# Altium PCB NUC977 DEV BOARD.PcbDoc (part 3 of 5)
Units mil, origin at the board's own origin, x right, y up, seen from the top; angles counter-clockwise.
Board outline 9012.5 x 7677.17 mil, 4 copper layers (Top, 2-GND, 3-POWER, Bottom), stack 35.4 mil thick; 487 components, 451 nets, 1969 pads, 1529 vias.
Unrouted connection lines stored in the file: 1.
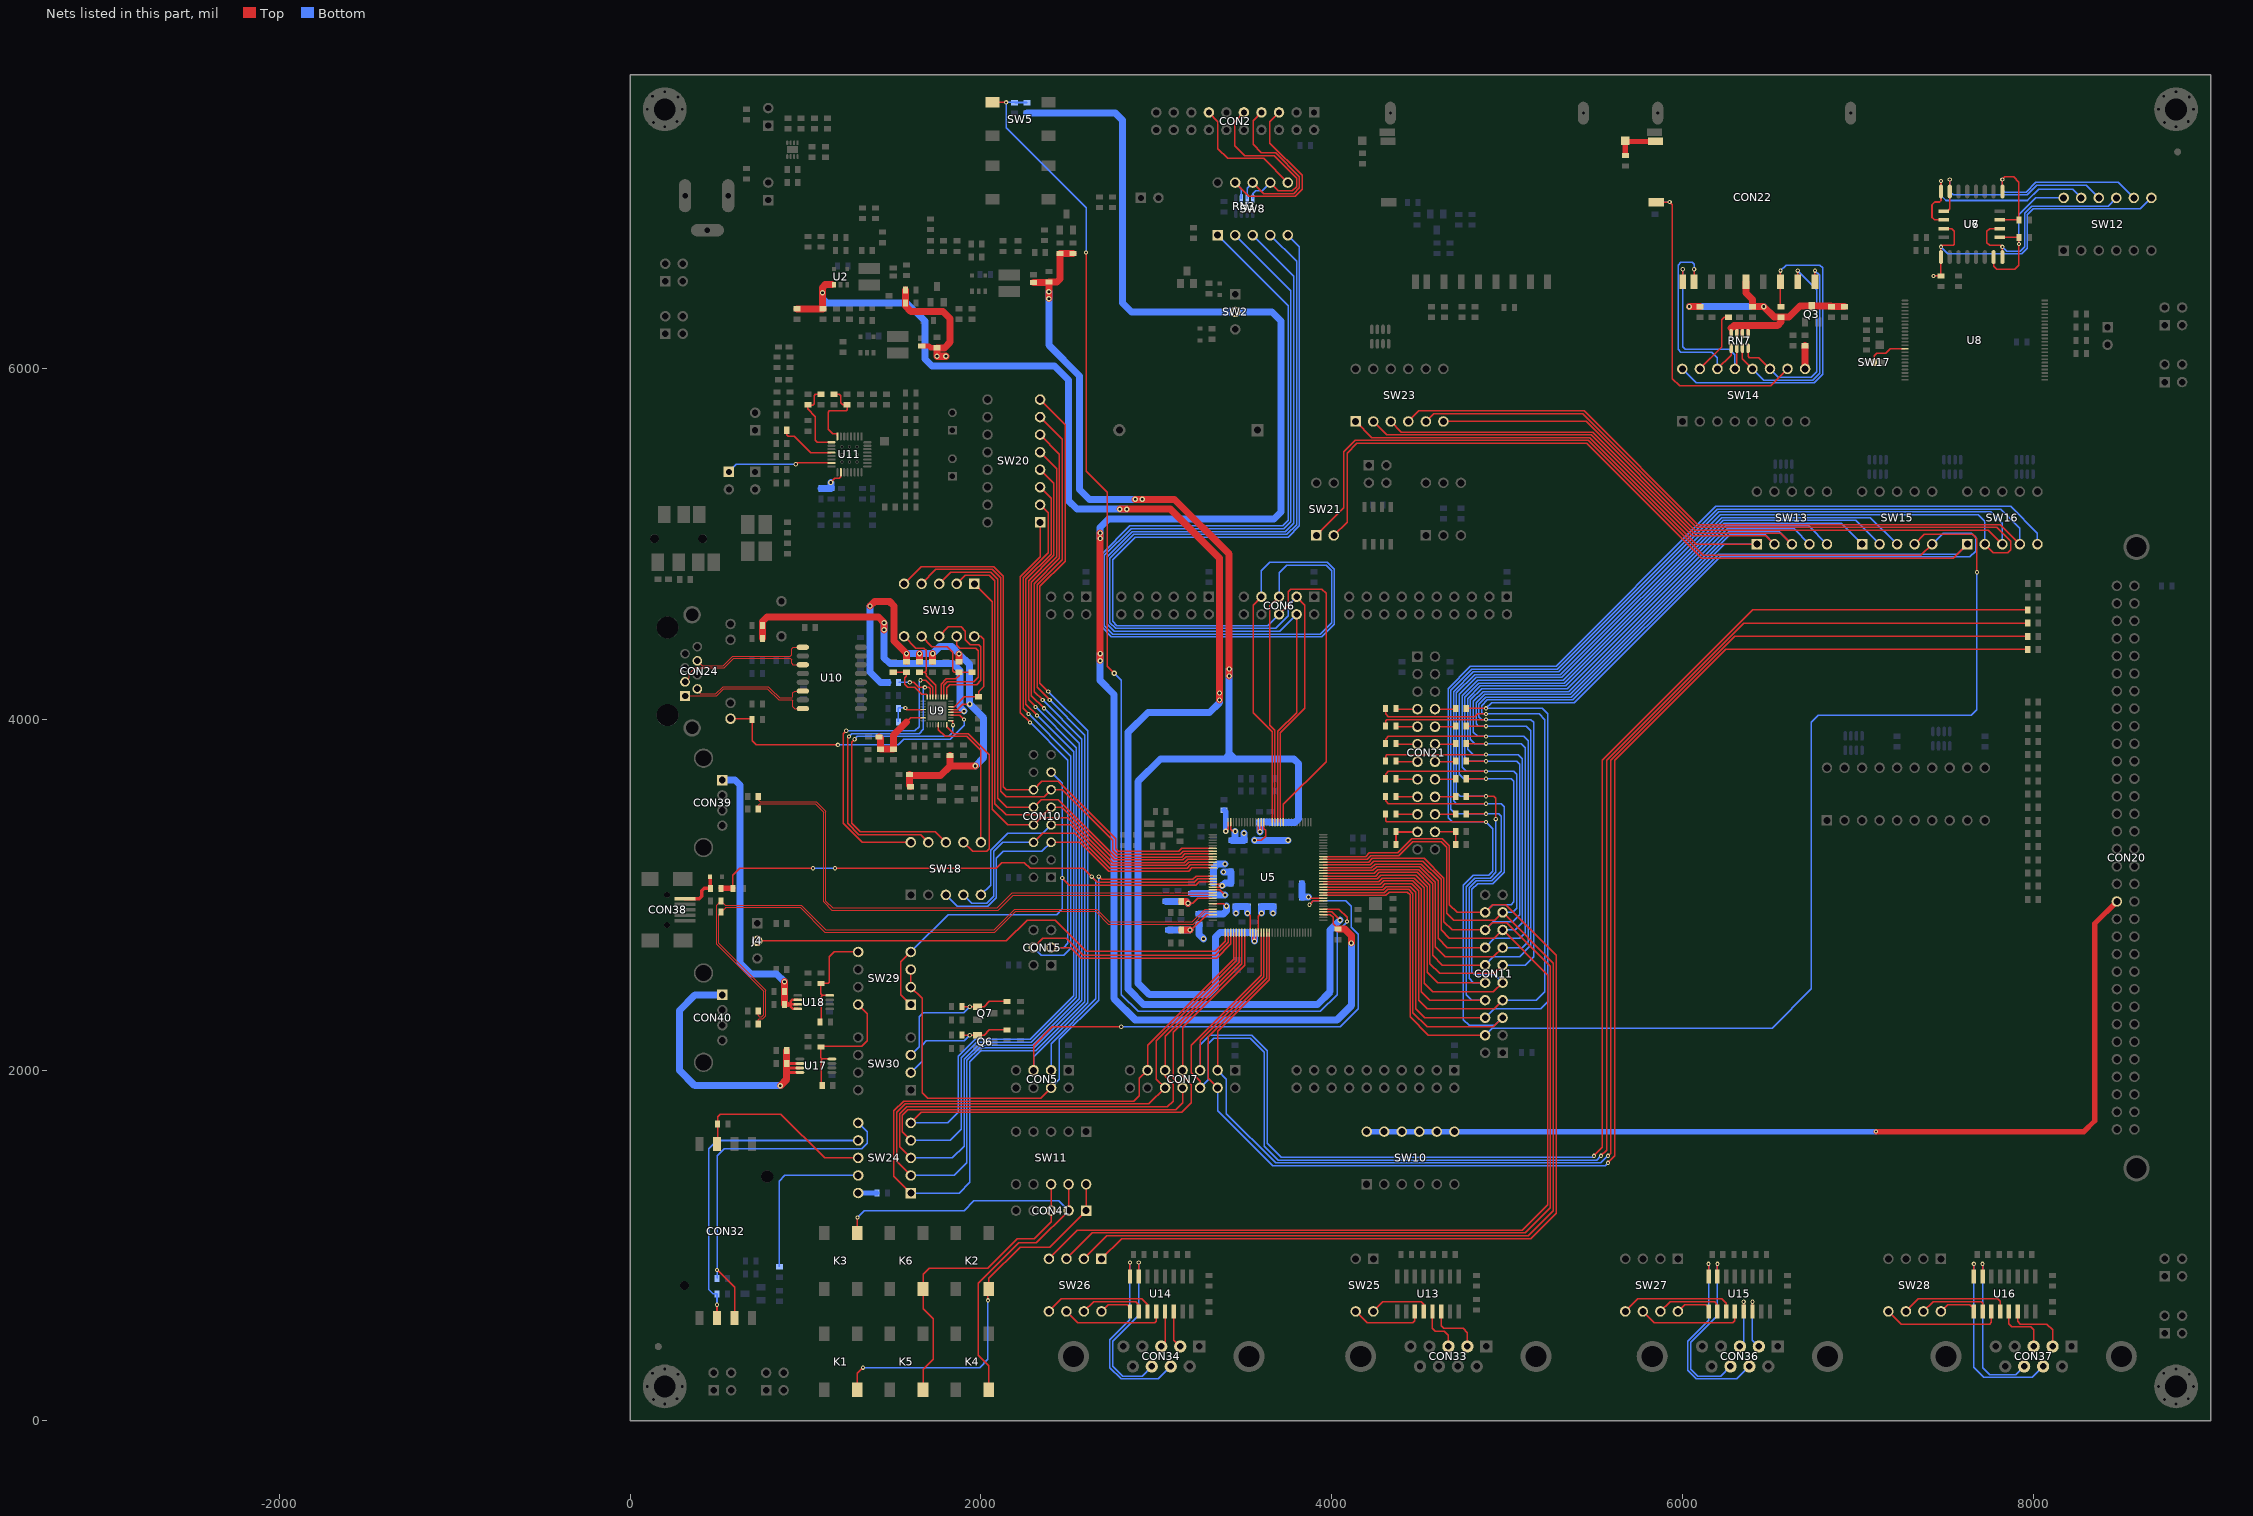
[diagram p5: the nets of this part, all layers, seen from the top]

## Via types
v1: diameter 24, hole 12, Top to Bottom, 897 vias
v2: diameter 30, hole 16, Top to Bottom, 628 vias
v3: diameter 20, hole 10, Top to Bottom, 4 vias

## Nets (pads, with @x,y where several pads share a name; then routed paths per layer and width w, separated by ;. In a path a pad name is that pad's centre, name@x,y a point inside that pad or via, vN(x,y) a via of type N, cw(c..) or ccw(c..) an arc to the next point about the centre after c; other vN are vias at no path point) (continued)
PF2: CON10.5 SW18.3 U5.109 | length 1906.9
  Top w8: CON10.5@2400,3300 2564,3300 2728,3136 3184,3136 3203.12,3155.12 U5.109@3322.54,3155.12
  Bottom w8: SW18.3@1800,3000 1864,2936 2040,2936 2088,2984 2088,3208 2128,3248 2348,3248 CON10.5@2400,3300
PF3: CON10.6 SW18.4 U5.108 | length 1848.7
  Top w8: CON10.6@2300,3300 2352,3352 2536,3352 2736,3152 3176,3152 3194.87,3170.87 U5.108@3322.54,3170.87
  Bottom w8: SW18.4@1900,3000 1948,2952 2032,2952 2072,2992 2072,3248 2124,3300 CON10.6@2300,3300
PF4: CON10.7 SW18.5 U5.107 | length 1709.2
  Top w8: CON10.7@2400,3400 2512,3400 2744,3168 3168,3168 3186.61,3186.61 U5.107@3322.54,3186.61
  Bottom w8: SW18.5@2000,3000 2056,3056 2056,3256 2152,3352 2352,3352 CON10.7@2400,3400
PF5: CON10.8 SW19.1 U5.106 | length 2754
  Top w8: SW19.1@1962,4774.5 2064,4672.5 2064,3488 2152,3400 CON10.8@2300,3400 2340,3440 2496,3440 2752,3184 3160,3184 3178.36,3202.36 U5.106@3322.54,3202.36
PF6: CON10.9 SW19.2 U5.105 | length 2942.8
  Top w8: SW19.2@1862,4774.5 1911.5,4824 2048,4824 2080,4792 2080,3520 2144,3456 2356,3456 CON10.9@2400,3500 2460,3500 2760,3200 3152,3200 3170.11,3218.11 U5.105@3322.54,3218.11
PF7: CON10.10 SW19.3 U5.104 | length 3035.3
  Top w8: SW19.3@1762,4774.5 1827.5,4840 2056,4840 2096,4800 2096,3552 2148,3500 CON10.10@2300,3500 2344,3544 2440,3544 2768,3216 3144,3216 3161.86,3233.86 U5.104@3322.54,3233.86
PF8: CON10.11 SW19.4 U5.103 | length 3152.5
  Top w8: SW19.4@1662,4774.5 1743.5,4856 2064,4856 2112,4808 2112,3592 2144,3560 2360,3560 CON10.11@2400,3600 2464,3600 2752,3312 2752,3256 2776,3232 3136,3232 3153.61,3249.61 U5.103@3322.54,3249.61
PF9: CON10.12 SW19.5 U5.102 | length 3256.3
  Top w8: SW19.5@1562,4774.5 1659.5,4872 2072,4872 2128,4816 2128,3616 2144,3600 CON10.12@2300,3600 2348,3648 2440,3648 2768,3320 2768,3264 2784,3248 3128,3248 3145.35,3265.35 U5.102@3322.54,3265.35
PF10: CON10.13 SW29.1 SW29.4 U5.114 | length 3002.1
  Top w8: SW29.1@1600,2374.5 1544,2430.5 1544,2618.5 SW29.4@1600,2674.5 ; v1(2464,3096) 2504,3056 3224,3056 3244.38,3076.38 U5.114@3322.54,3076.38
  Bottom w8: SW29.4@1600,2674.5 1813.5,2888 2432,2888 2464,2920 v1(2464,3096) 2464,3636 CON10.13@2400,3700
PG0: CON15.3 SW20.1 U5.3 | length 3814
  Top w8: v1(2280,3984) 2224,4040 2224,4814.5 2337.5,4928 SW20.1@2337.5,5125 ; CON15.3@2400,2700 2513,2700 2573,2640 3344,2640 3424.9,2720.9 U5.3@3424.9,2785.04
  Bottom w8: v1(2280,3984) 2496,3768 2496,2724 2472,2700 CON15.3@2400,2700
PG1: CON15.4 SW20.2 U5.2 | length 4224
  Top w8: v1(2272,4032) 2240,4064 2240,4808 2384,4952 2384,5178.5 SW20.2@2337.5,5225 ; CON15.4@2300,2700 2352,2752 2488,2752 2584,2656 3336,2656 3409.15,2729.15 U5.2@3409.15,2785.04
  Bottom w8: v1(2272,4032) 2512,3792 2512,2696 2472,2656 2344,2656 CON15.4@2300,2700
PG6: CON7.3 RL19.1 U5.17 | length 8418.1
  Top w8: CON7.3@3350,2000 3350,2222 3645.37,2517.37 U5.17@3645.37,2785.04 ; v1(5576,1512) 5592,1528 5592,3768 6299,4475 RL19.1@7970,4475
  Bottom w8: CON7.3@3350,2000 3400,1950 3400,1752 3680,1472 5536,1472 v1(5576,1512)
PG7: CON7.4 RL20.1 U5.16 | length 8466.6
  Top w8: CON7.4@3350,1900 3296,1954 3296,2192 3629.63,2525.63 U5.16@3629.63,2785.04 ; v1(5576,1472) 5616,1512 5616,3768 6248,4400 RL20.1@7970,4400
  Bottom w8: CON7.4@3350,1900 3350,1770 3664,1456 5560,1456 v1(5576,1472)
PG8: CON7.5 RL21.1 U5.15 | length 9007.9
  Top w8: CON7.5@3250,2000 3250,2170 3613.88,2533.88 U5.15@3613.88,2785.04 ; v1(5496,1512) 5544,1560 5544,3768 6401,4625 RL21.1@7970,4625
  Bottom w8: CON7.5@3250,2000 3250,2146 3304,2200 3544,2200 3632,2112 3632,1584 3712,1504 5488,1504 v1(5496,1512)
PG9: CON7.6 RL22.1 U5.14 | length 9202.4
  Top w8: CON7.6@3250,1900 3250,1936 3200,1986 3200,2144 3598.13,2542.13 U5.14@3598.13,2785.04 ; v1(5536,1512) 5568,1544 5568,3768 6350,4550 RL22.1@7970,4550
  Bottom w8: CON7.6@3250,1900 3296,1946 3296,2152 3328,2184 3536,2184 3616,2104 3616,1568 3696,1488 5512,1488 v1(5536,1512)
PG10: CON7.7 SW20.3 SW24.5 U5.8 | length 7298.8
  Top w8: SW24.5@1600,1700 1660,1760 3144,1760 3200,1816 3200,1918 3150,1968 CON7.7@3150,2000 3150,2246 3503.64,2599.64 U5.8@3503.64,2785.04 ; v1(2320,4024) 2256,4088 2256,4800 2400,4944 2400,5262.5 SW20.3@2337.5,5325
  Bottom w8: SW24.5@1600,1700 1812,1700 1872,1760 1872,2080 1968,2176 2280,2176 2528,2424 2528,3816 v1(2320,4024)
PG11: CON7.8 SW20.4 SW24.4 U5.7 | length 7681.4
  Top w8: SW24.4@1600,1600 1552,1648 1552,1744 1584,1776 3112,1776 3150,1814 CON7.8@3150,1900 3096,1954 3096,2216 3487.89,2607.89 U5.7@3487.89,2785.04 ; v1(2312,4072) 2272,4112 2272,4792 2416,4936 2416,5346.5 SW20.4@2337.5,5425
  Bottom w8: SW24.4@1600,1600 1824,1600 1888,1664 1888,2072 1976,2160 2288,2160 2544,2416 2544,3840 v1(2312,4072)
PG12: CON7.9 SW20.5 SW24.3 U5.6 | length 7978.4
  Top w8: SW24.3@1600,1500 1536,1564 1536,1752 1576,1792 3064,1792 3096,1824 3096,1920 3050,1966 CON7.9@3050,2000 3050,2194 3472.15,2616.15 U5.6@3472.15,2785.04 ; SW20.5@2337.5,5525 2432,5430.5 2432,4928 2288,4784 2288,4136 v1(2360,4064)
  Bottom w8: SW24.3@1600,1500 1836,1500 1904,1568 1904,2064 1984,2144 2296,2144 2560,2408 2560,3864 v1(2360,4064)
PG13: CON7.10 SW20.6 SW24.2 U5.5 | length 8251.3
  Top w8: SW24.2@1600,1400 1520,1480 1520,1760 1568,1808 2958,1808 CON7.10@3050,1900 3000,1950 3000,2168 3456.4,2624.4 U5.5@3456.4,2785.04 ; SW20.6@2337.5,5625 2448,5514.5 2448,4920 2304,4776 2304,4160 v1(2352,4112)
  Bottom w8: SW24.2@1600,1400 1848,1400 1920,1472 1920,2056 1992,2128 2304,2128 2576,2400 2576,3888 v1(2352,4112)
PG14: CON7.11 SW20.7 SW24.1 U5.4 | length 8500.6
  Top w8: SW24.1@1600,1300 1504,1396 1504,1768 1560,1824 2872,1824 2904,1856 2904,1954 CON7.11@2950,2000 2950,2142 3440.65,2632.65 U5.4@3440.65,2785.04 ; SW20.7@2337.5,5725 2464,5598.5 2464,4912 2320,4768 2320,4184 v1(2392,4112)
  Bottom w8: SW24.1@1600,1300 1876,1300 1936,1360 1936,2048 2000,2112 2312,2112 2592,2392 2592,3912 v1(2392,4112)
PH0: CON5.3 R111.1 R113.2 U5.113 | length 4185.3
  Top w8: R113.2@585.5,3037.5 585.5,3113.5 624,3152 1042.46,3152 v1(1042.46,3152.16) ; v1(1168.31,3152.16) 1168.31,3152 2088,3152 2120,3184 2248,3184 2280,3152 2584,3152 v1(2632,3104) 2664,3072 3216,3072 3236.13,3092.13 U5.113@3322.54,3092.13
  Top w30: R111.1@517.5,3037.5 R113.2@585.5,3037.5
  Bottom w8: v1(1042.46,3152.16) 1072,3152 1152,3152 v1(1168.31,3152.16) ; CON5.3@2400,2000 2400,2152 2656,2408 2656,3080 v1(2632,3104)
PH1: CON5.4 SW29.2 SW29.3 U5.112 | length 3485.2
  Top w8: SW29.3@1600,2574.5 SW29.2@1600,2474.5 1664,2410.5 1664,1872 1696,1840 2340,1840 CON5.4@2400,1900 ; v1(2672,3104) 2688,3088 3208,3088 3227.87,3107.87 U5.112@3322.54,3107.87
  Bottom w8: CON5.4@2400,1900 2448,1948 2448,2176 2672,2400 v1(2672,3104)
PH7: CON5.5 SW20.8 U5.40 | length 7210.8
  Top w8: CON5.5@2300,2000 2300,2140 2408,2248 v1(2800,2248) ; SW20.8@2337.5,5825 2480,5682.5 2480,4904 2336,4760 2336,4208 v1(2384,4160) ; v1(3873.86,2944) 3896,2966.14 U5.40@3952.46,2966.14
  Bottom w8: CON5.5@2300,2000 2300,2076 2608,2384 2608,3936 v1(2384,4160) ; v1(2800,2248) 4048,2248 4152,2352 4152,2776 4112,2816 4112,2934.14 4080,2966.14 3896,2966.14 v1(3873.86,2944)
PHYAD0: CON24.9 R69.2 U9.11 | length 1628.9
  Top w8: CON24.9@571.95,4004.92 690.08,4004.92 R69.2@695,4000 695,3880 719,3856 v1(1184,3856) ; U9.11@1828.24,4025.88 1878.12,4025.88 v1(1904,4000)
  Bottom w8: v1(1184,3856) 1528,3856 1560,3888 1824,3888 1904,3968 v1(1904,4000)
PHYAD3: R64.1 R71.1 U9.12 | length 1835.6
  Top w8: U9.12@1828.24,4041.63 1896,4041.63 1902.37,4048 v2(1904,4048)
  Top w40: R71.1@755,4462.5 R64.1@755,4537.5 755,4560 779,4584 1416,4584 v2(1448,4552) v2(1448,4512)
  Bottom w40: v2(1448,4552) v2(1448,4512) 1448,4351.25 1480.5,4318.75 1840,4318.75 1880,4278.75 1880,4072 v2(1904,4048)
PHYAVD33: CB28.2 CT70.1 L7.2 U9.31 | length 438.9
  Top w8: 1576,3986.13 1600,4010.13 U9.31@1670.76,4010.13
  Top w40: L7.2@1420,3901 1427.5,3893.5 CB28.2@1427.5,3831 CT70.1@1502.5,3831 1501.87,3831.63 1501.87,3912 1576,3986.13
PHYIOVD33: CT68.1 L6.2 R55.2 R57.2 R59.2 R61.2 R122.2 R123.2 U9.13 | length 2845.8
  Top w8: U9.13@1828.24,4057.37 1865.37,4057.37 1896,4088 v2(1936,4088)
  Top w40: v2(1368,4648) 1392,4672 1480,4672 1504,4648 1504,4447 v2(1575,4376) R55.2@1575,4330 ; L6.2@1592,3687 L6.2@1592,3680 ; CT68.1@1599.5,3617 1592.5,3624 1592,3624 L6.2@1592,3680 ; R123.2@1650,4330 v2(1650,4376) ; R59.2@1725,4330 v2(1725,4376) ; R57.2@1825,3795 1825,3736 ; R61.2@1875,4330 v2(1875,4375) ; v2(1968,3736) 1825,3736 ; L6.2@1592,3680 1769,3680 1825,3736
  Bottom w40: v2(1368,4648) 1368,4272 1427.5,4212.5 R122.2@1470,4212.5 ; v2(1575,4376) v2(1650,4376) v2(1725,4376) 1765,4416 1834,4416 v2(1875,4375) 1936,4314 v2(1936,4088) 2016,4008 2016,3784 v2(1968,3736)
PHYTEST: R55.1 R56.2 U9.24 | length 310.6
  Top w8: R56.2@1500,4270 R55.1@1575,4270 1575,4248 1566.42,4239.42 1566.42,4201.97 1583.84,4184.55 1621.22,4184.55 1661.77,4144 1688,4144 1694.38,4137.62 U9.24@1694.38,4128.24
PI1: CON11.4 SW15.4 U5.42 | length 7504.2
  Top w8: U5.42@3952.46,2997.64 4309.64,2997.64 4328,3016 4432,3016 4448,3000 4448,2304 4552,2200 CON11.4@4875,2200 ; SW15.4@7325,5000 7381,5056 7656,5056 7680,5032 v1(7680,4840)
  Bottom w8: CON11.4@4875,2200 4915,2240 6512,2240 6736,2464 6736,3984 6776,4024 7648,4024 7680,4056 v1(7680,4840)
PI2: CON11.5 RS1.1 SW16.5 U5.43 | length 8789.5
  Top w8: U5.43@3952.46,3013.39 4301.39,3013.39 4320,3032 4440,3032 4464,3008 4464,2328 4544,2248 4923,2248 CON11.5@4975,2300 ; RS1.1@4307.5,3462.5 4307.5,3424 4315.5,3416 v1(4880,3416)
  Bottom w8: CON11.5@4975,2300 4931,2256 4784,2256 4752,2288 4752,3056 4808,3112 4896,3112 4920,3136 4920,3376 v1(4880,3416) 4688,3416 4664,3440 4664,4176 4792,4304 5280,4304 6192,5216 7872,5216 8025,5063 SW16.5@8025,5000
PI3: CON11.6 RS3.1 SW15.5 SW21.1 U5.44 | length 11891.9
  Top w8: SW21.1@3912.5,5050 4070.5,5208 4070.5,5526.5 4136,5592 5464,5592 6120,4936 7361,4936 SW15.5@7425,5000 ; U5.44@3952.46,3029.13 4293.13,3029.13 4312,3048 4448,3048 4480,3016 4480,2352 4532,2300 CON11.6@4875,2300 ; RS3.1@4767.5,4062.5 4767.5,4064 v1(4880,4064)
  Bottom w8: CON11.6@4875,2300 4927,2352 5192,2352 5232,2392 5232,4032 5200,4064 v1(4880,4064) 4912,4096 5384,4096 6216,4928 7640,4928 7672,4960 7672,5040 7648,5064 7489,5064 SW15.5@7425,5000
PI4: CON11.7 RS5.1 SW16.1 SW21.2 U5.45 | length 12072.9
  Top w8: U5.45@3952.46,3044.88 4284.88,3044.88 4304,3064 4456,3064 4496,3024 4496,2400 4544,2352 4927,2352 CON11.7@4975,2400 ; SW21.2@4012.5,5050 4088,5125.5 4088,5520 4144,5576 5456,5576 6112,4920 7545,4920 SW16.1@7625,5000 ; RS5.1@4307.5,4062.5 4307.5,4032 4323.5,4016 4816,4016 4832,4032 v1(4880,4032)
  Bottom w8: CON11.7@4975,2400 5168,2400 5216,2448 5216,4000 5184,4032 v1(4880,4032) 4864,4032 4856,4040 4856,4080 4888,4112 5376,4112 6208,4944 7569,4944 SW16.1@7625,5000
PI5: CON11.8 RS7.1 SW16.2 SW23.5 U5.46 | length 11289.4
  Top w8: U5.46@3952.46,3060.63 4276.63,3060.63 4296,3080 4464,3080 4512,3032 4512,2448 4560,2400 CON11.8@4875,2400 ; SW23.5@4537.5,5700 4581.5,5744 5432,5744 6080,5096 7792,5096 7872,5016 7872,4968 7856,4952 7773,4952 SW16.2@7725,5000 ; RS7.1@4767.5,3562.5 v1(4880,3562.5) 4925.5,3562.5 4936,3552 v1(4936,3432)
  Bottom w8: CON11.8@4875,2400 4800,2400 4768,2432 4768,3048 4816,3096 4904,3096 4936,3128 v1(4936,3432) ; v1(4880,3562.5) 4733.5,3562.5 4712,3584 4712,4152 4816,4256 5304,4256 6216,5168 7688,5168 7725,5131 SW16.2@7725,5000
PI6: CON11.9 RS9.1 SW16.3 SW23.6 U5.47 | length 11618.3
  Top w8: U5.47@3952.46,3076.38 4268.38,3076.38 4288,3096 4472,3096 4528,3040 4528,2496 4576,2448 4923,2448 CON11.9@4975,2500 ; RS9.1@4307.5,3562.5 4307.5,3536 4323.5,3520 v1(4880,3520) ; SW23.6@4637.5,5700 5452,5700 6072,5080 7745,5080 SW16.3@7825,5000
  Bottom w8: CON11.9@4975,2500 4931,2544 4816,2544 4800,2560 4800,3032 4832,3064 4920,3064 4984,3128 4984,3504 4968,3520 v1(4880,3520) 4712,3520 4696,3536 4696,4160 4808,4272 5296,4272 6208,5184 7760,5184 7825,5119 SW16.3@7825,5000
PI7: CON11.10 RS11.1 SW16.4 SW23.4 U5.48 | length 11355.7
  Top w8: U5.48@3952.46,3092.13 4260.13,3092.13 4280,3112 4480,3112 4544,3048 4544,2560 4604,2500 CON11.10@4875,2500 ; SW23.4@4437.5,5700 4497.5,5760 5440,5760 6088,5112 7813,5112 SW16.4@7925,5000 ; RS11.1@4767.5,3462.5 v1(4880,3462.5)
  Bottom w8: CON11.10@4875,2500 4808,2500 4784,2524 4784,3040 4824,3080 4912,3080 4968,3136 4968,3448 4953.5,3462.5 v1(4880,3462.5) 4705.5,3462.5 4680,3488 4680,4168 4800,4288 5288,4288 6200,5200 7816,5200 7925,5091 SW16.4@7925,5000
PI8: CON11.11 RS13.1 SW13.1 SW23.1 U5.49 | length 8627.4
  Top w8: U5.49@3952.46,3107.87 4251.87,3107.87 4272,3128 4488,3128 4560,3056 4560,2608 4616,2552 4927,2552 CON11.11@4975,2600 ; SW23.1@4137.5,5700 4229.5,5608 5472,5608 6080,5000 SW13.1@6425,5000 ; RS13.1@4307.5,3962.5 4307.5,3992 4315.5,4000 v1(4880,4000)
  Bottom w8: CON11.11@4975,2600 5104,2600 5152,2648 5152,3984 5136,4000 v1(4880,4000) 4856,4000 4840,4016 4840,4088 4880,4128 5368,4128 6240,5000 SW13.1@6425,5000
PI9: CON11.12 RS15.1 SW13.2 SW23.2 U5.50 | length 8187.1
  Top w8: U5.50@3952.46,3123.62 4243.62,3123.62 4264,3144 4496,3144 4576,3064 4576,2656 4632,2600 CON11.12@4875,2600 ; SW23.2@4237.5,5700 4313.5,5624 5480,5624 6056,5048 6477,5048 SW13.2@6525,5000 ; RS15.1@4767.5,3962.5 v1(4880,3962.5)
  Bottom w8: CON11.12@4875,2600 4923,2648 5072,2648 5136,2712 5136,3936 5109.5,3962.5 v1(4880,3962.5) 4837.5,3962.5 4824,3976 4824,4096 4872,4144 5360,4144 6272,5056 6469,5056 SW13.2@6525,5000
PI10: CON11.13 RS2.1 SW13.3 SW23.3 U5.51 | length 8724.3
  Top w8: U5.51@3952.46,3139.37 4235.37,3139.37 4256,3160 4504,3160 4592,3072 4592,2704 4648,2648 4923,2648 CON11.13@4975,2700 ; RS2.1@4307.5,3862.5 4307.5,3888 4323.5,3904 v1(4880,3904) ; SW23.3@4337.5,5700 4397.5,5640 5488,5640 6064,5064 6561,5064 SW13.3@6625,5000
  Bottom w8: CON11.13@4975,2700 5088,2700 5120,2732 5120,3880 5096,3904 v1(4880,3904) 4832,3904 4808,3928 4808,4104 4864,4160 5352,4160 6264,5072 6553,5072 SW13.3@6625,5000
PI11: CON11.14 RS4.1 SW13.4 U5.52 | length 5682.4
  Top w8: U5.52@3952.46,3155.12 4227.12,3155.12 4248,3176 4512,3176 4608,3080 4608,2752 4660,2700 CON11.14@4875,2700 ; RS4.1@4767.5,3862.5 v1(4880,3862.5)
  Bottom w8: CON11.14@4875,2700 4927,2752 5072,2752 5104,2784 5104,3840 5081.5,3862.5 v1(4880,3862.5) 4817.5,3862.5 4792,3888 4792,4112 4856,4176 5344,4176 6256,5088 6637,5088 SW13.4@6725,5000
PI12: CON11.15 RS6.1 SW13.5 SW26.4 U5.53 | length 10842
  Top w8: SW26.4@2387.5,925 2550.5,1088 5088,1088 5232,1232 5232,2543 CON11.15@4975,2800 4927,2752 4672,2752 4624,2800 4624,3088 4520,3192 4240,3192 4218.87,3170.87 U5.53@3952.46,3170.87 ; RS6.1@4307.5,3762.5 4307.5,3792 4315.5,3800 v1(4880,3800)
  Bottom w8: CON11.15@4975,2800 5048,2800 5088,2840 5088,3776 5064,3800 v1(4880,3800) 4808,3800 4776,3832 4776,4120 4848,4192 5336,4192 6248,5104 6721,5104 SW13.5@6825,5000
PI13: CON11.16 RS8.1 SW15.1 SW26.3 U5.54 | length 10596.6
  Top w8: SW26.3@2487.5,925 2634.5,1072 5104,1072 5248,1216 5248,2592 5000,2840 4915,2840 CON11.16@4875,2800 4688,2800 4640,2848 4640,3096 4528,3208 4232,3208 4210.61,3186.61 U5.54@3952.46,3186.61 ; RS8.1@4767.5,3762.5 v1(4880,3762.5)
  Bottom w8: CON11.16@4875,2800 4923,2848 5032,2848 5072,2888 5072,3746.5 5056,3762.5 v1(4880,3762.5) 4781.5,3762.5 4760,3784 4760,4128 4840,4208 5328,4208 6240,5120 6905,5120 SW15.1@7025,5000
PI14: CON11.17 RS10.1 SW15.2 SW26.2 U5.55 | length 11146.5
  Top w8: SW26.2@2587.5,925 2718.5,1056 5120,1056 5264,1200 5264,2611 CON11.17@4975,2900 4931,2856 4696,2856 4656,2896 4656,3272 4624,3304 4464,3304 4384,3224 4224,3224 4202.36,3202.36 U5.55@3952.46,3202.36 ; RS10.1@4307.5,3662.5 4307.5,3688 4323.5,3704 v1(4880,3704)
  Bottom w8: CON11.17@4975,2900 5032,2900 5056,2924 5056,3688 5040,3704 v1(4880,3704) 4768,3704 4744,3728 4744,4136 4832,4224 5320,4224 6232,5136 6989,5136 SW15.2@7125,5000
PI15: CON11.18 RS12.1 SW15.3 SW26.1 U5.56 | length 10802.2
  Top w8: SW26.1@2687.5,925 2802.5,1040 5136,1040 5280,1184 5280,2656 4992,2944 4919,2944 CON11.18@4875,2900 4716,2900 4672,2944 4672,3280 4632,3320 4456,3320 4376,3240 4216,3240 4194.11,3218.11 U5.56@3952.46,3218.11 ; RS12.1@4767.5,3662.5 v1(4880,3662.5)
  Bottom w8: CON11.18@4875,2900 4919,2944 5024,2944 5040,2960 5040,3648 5025.5,3662.5 v1(4880,3662.5) 4753.5,3662.5 4728,3688 4728,4144 4824,4240 5312,4240 6224,5152 7073,5152 SW15.3@7225,5000
PJ0: CON6.3 SW8.4 U5.76 | length 5773.9
  Top w8: U5.76@3708.37,3414.96 3708.37,3924.37 3848,4064 3848,4652 CON6.3@3800,4700
  Bottom w8: SW8.4@3650,6762.5 3800,6612.5 3800,5112 3744,5056 2872,5056 2736,4920 2736,4552 2768,4520 3680,4520 3752,4592 3752,4652 CON6.3@3800,4700
PJ1: CON6.4 SW8.3 U5.77 | length 5632.8
  Top w8: U5.77@3692.62,3414.96 3692.62,3932.62 3800,4040 CON6.4@3800,4600
  Bottom w8: SW8.3@3550,6762.5 3784,6528.5 3784,5120 3736,5072 2864,5072 2720,4928 2720,4544 2760,4504 3704,4504 CON6.4@3800,4600
PJ2: CON6.5 SW8.2 U5.78 | length 6734.2
  Top w8: U5.78@3676.87,3414.96 3676.87,3939.13 3648,3968 3648,4648 CON6.5@3700,4700
  Bottom w8: SW8.2@3450,6762.5 3768,6444.5 3768,5128 3728,5088 2856,5088 2704,4936 2704,4536 2752,4488 3936,4488 4000,4552 4000,4848 3968,4880 3744,4880 3700,4836 CON6.5@3700,4700
PJ3: CON6.6 SW8.5 U5.75 | length 5954
  Top w8: CON6.6@3700,4600 3752,4652 3752,4728 3768,4744 3944,4744 3968,4720 3968,3760 3724.11,3516.11 U5.75@3724.11,3414.96
  Bottom w8: CON6.6@3700,4600 3636,4536 2776,4536 2752,4560 2752,4912 2880,5040 3752,5040 3816,5104 3816,6696.5 SW8.5@3750,6762.5
PJ4: CON6.7 SW8.1 U5.79 | length 6996.1
  Top w8: CON6.7@3600,4700 3552,4652 3552,4040 3661.12,3930.88 U5.79@3661.12,3414.96
  Bottom w8: SW8.1@3350,6762.5 3752,6360.5 3752,5136 3720,5104 2848,5104 2688,4944 2688,4528 2744,4472 3944,4472 4016,4544 4016,4856 3976,4896 3648,4896 3600,4848 CON6.7@3600,4700
PLLVS: RG1.2 U5.95 | length 180.7
  Top w8: v2(3396,3362.85) 3409.15,3376 U5.95@3409.15,3414.96
  Bottom w30: RG1.2@3387.5,3482.5 3396,3474 v2(3396,3362.85)
PSL: SW17.2 U8.39 | length 228.8
  Top w8: SW17.2@7095,6037.5 7095,6074.94 7108.06,6088 7160,6088 7186.67,6114.67 U8.39@7269.88,6114.67
PWM: CON20.37 SW10.7 SW10.8 SW10.9 SW10.10 SW10.11 SW10.12 | length 5480.5
  Top w30: v1(7104,1650) 8290,1650 8352,1712 8352,2836.45 CON20.37@8478.15,2962.6
  Bottom w30: SW10.12@4200,1650 SW10.11@4300,1650 SW10.10@4400,1650 SW10.9@4500,1650 SW10.8@4600,1650 SW10.7@4700,1650 v1(7104,1650)
RAUXI: C30.2 U11.20 | length 323.2
  Top w8: C30.2@892.5,5650 892.5,5624 900.5,5616 936,5616 1029.66,5522.34 U11.20@1147.64,5522.34
REGOUT: CB29.2 CT71.1 U9.28 | length 224.1
  Top w8: v1(1568.81,4066.18) 1577.62,4057.37 U9.28@1670.76,4057.37
  Bottom w8: CT71.1@1529.5,3987 CB29.2@1529.5,4062 1529.5,4066.18 v1(1568.81,4066.18)
RMII0CRSDV: R61.1 R62.2 SW19.7 U9.19 | length 650.6
  Top w8: SW19.7@1662,4474.5 1720.5,4416 1808,4416 1840,4384 1840,4278 1848,4270 R61.1@1875,4270 ; U9.19@1773.12,4128.24 1773.12,4202.38 1802.75,4232 1857,4232 1875,4250 R61.1@1875,4270 ; R62.2@1950,4270 1879,4269.5 R61.1@1875,4270
RMII0MDC: SW18.10 U9.22 | length 1798.8
  Top w8: v1(1232,3936) 1216,3920 1216,3408 1324,3300 SW18.10@1600,3300 ; v1(1656,4224) 1685.88,4224 1725.88,4184 U9.22@1725.88,4128.24
  Bottom w8: v1(1232,3936) 1624,3936 1648,3960 1648,4216 v1(1656,4224)
RMII0MDIO: R122.1 SW18.9 U9.23 | length 1931
  Top w8: v1(1248,3904) 1240,3896 1240,3408 1304,3344 1656,3344 SW18.9@1700,3300 ; v1(1594.15,4212.37) 1617.5,4212.37 1645.87,4184 v1(1680,4184) 1702.13,4184 1710.13,4176 U9.23@1710.13,4128.24
  Bottom w8: v1(1248,3904) 1264,3920 1648,3920 1672,3944 1672,4176 v1(1680,4184) ; R122.1@1530,4212.5 1530,4212.37 v1(1594.15,4212.37)
RMII0REFCLK: R54.1 SW19.10 U9.14 | length 583.7
  Top w8: U9.14@1828.24,4073.12 1849.12,4073.12 1856,4080
  Top w10: 1856,4080 1905.83,4129.83 1962.47,4129.83 R54.1@1987.5,4130 1987.5,4160 2016,4188.5 2016,4458.5 2000,4474.5 SW19.10@1962,4474.5
RMII0RXD0: SW19.9 U9.18 | length 619.4
  Top w8: U9.18@1788.87,4128.24 1788.87,4196.91 1807.96,4216 1960,4216 1984,4240 1984,4392 1970.15,4405.85 1880.15,4405.85 1862,4424 SW19.9@1862,4474.5
RMII0RXD1: SW19.8 U9.17 | length 793.1
  Top w8: SW19.8@1762,4474.5 1815,4528 1887,4528 1912,4503 1912,4455 1939.82,4427.18 1988.82,4427.18 2000,4416 2000,4224 1976,4200 1823,4200 1804.62,4181.62 U9.17@1804.62,4128.24
RMII0TXD0: SW18.8 U9.9 | length 1720.7
  Top w8: v1(1280,3888) 1264,3872 1264,3408 1312,3360 1740,3360 SW18.8@1800,3300 ; U9.9@1828.24,3994.38 1837.62,3994.38 1840,3992 v1(1840,3968)
  Bottom w8: v1(1280,3888) 1296,3904 1816,3904 1840,3928 v1(1840,3968)
RMII0TXD1: SW18.7 U9.8 | length 1032.7
  Top w8: U9.8@1804.62,3970.76 1804.62,3959.81 1844.42,3920 1928,3920 2048,3800 2048,3264 2032,3248 1952,3248 SW18.7@1900,3300
RMII0TXEN: SW18.6 U9.5 | length 843.9
  Top w8: U9.5@1757.37,3970.76 1757.37,3942.63 1796,3904 1920,3904 2000,3824 SW18.6@2000,3300
RMIIRXERR: R123.1 SW19.6 U9.21 | length 483.3
  Top w8: SW19.6@1562,4474.5 1629.5,4407 1674.59,4407 1687.5,4394.09 1687.5,4277.5 1680,4270 ; R123.1@1650,4270 1680,4270 ; U9.21@1741.63,4128.24 1741.63,4194.37 1687.5,4248.5 1687.5,4262.5 1680,4270
ROW0: CON41.1 K1.3 K2.3 SW11.10 | length 2208.6
  Top w8: K1.3@1294.68,177.66 1294.68,272 v1(1326.68,304) ; v1(2040,688) 2040,755.4 K2.3@2044.68,760.09 ; K2.3@2044.68,752.66 K2.3@2044.68,760.09 ; SW11.10@2600,1350 CON41.1@2600,1200 2392,992 2224,992 2044.68,812.68 K2.3@2044.68,760.09
  Bottom w8: v1(1326.68,304) 1992,304 2040,352 v1(2040,688)
ROW1: CON41.2 K3.4 K4.3 SW11.9 | length 2825
  Top w8: K3.4@1294.68,1072.34 1296,1073.66 v1(1296,1160) ; K4.3@2044.68,177.66 2044.68,315.32 1984,376 1984,784 2216,1016 2316,1016 CON41.2@2500,1200 SW11.9@2500,1350
  Bottom w8: v1(1296,1160) 1336,1200 1904,1200 1960,1256 2444,1256 CON41.2@2500,1200
ROW2: CON41.3 K5.3 K6.3 SW11.8 | length 1776.2
  Top w8: K5.3@1669.68,177.66 1669.68,293.68 1728,352 1728,581.68 1669.68,640 1669.68,744 K6.3@1669.68,752.66 1669.68,837.68 1704,872 2040,872 2208,1040 2304,1040 2400,1136 CON41.3@2400,1200 SW11.8@2400,1350
RSPKOUT: CON25.1 U11.23 | length 606
  Top w8: v1(944,5456) 952,5463.29 U11.23@1147.64,5463.29
  Bottom w8: CON25.1@562.5,5412.5 606,5456 v1(944,5456)
RTCVD: CB7.1 R20.2 SW2.2 U5.35 | length 9564.7
  Top w8: U5.35@3952.46,2887.4 3992.08,2887.4 4008,2871.48 4008,2834.5 CB7.1@4037.5,2805
  Top w40: v2(2680,4336) v2(2680,4376) v2(2680,5032) v2(2680,5064) ; CB7.1@4037.5,2805 4075,2805 4112,2768 v2(4112,2725)
  Bottom w40: R20.2@2264,7458 2768,7458 2808,7418 2808,6376 2859,6325 SW2.2@3450,6325 3659,6325 3712,6272 3712,5184 3672,5144 2728,5144 2680,5096 v2(2680,5064) v2(2680,5032) ; v2(2680,4376) v2(2680,4336) 2680,4224 2760,4144 2760,2408 2880,2288 4032,2288 4112,2368 v2(4112,2725)
RX+: CON24.3 U10.11 | length 770.6
  Top w4: CON24.3@312.5,4214.76 337.6,4239.87 337.6,4261.56 371.12,4295.08 535.29,4295.08 590.71,4350.5 912,4350.5 920,4342.5 920,4320 928,4312 984.5,4312 U10.11@984.5,4312.5
RX-: CON24.6 U10.9 | length 676.7
  Top w4: CON24.6@382.58,4335.24 410.74,4307.08 530.32,4307.08 585.74,4362.5 912,4362.5 920,4370.5 920,4403.69 928.81,4412.5 U10.9@984.5,4412.5
S_CLK: CON21.8 RS3.2 | length 119.2
  Top w10: CON21.8@4589.57,4059.55 4704.55,4059.55 RS3.2@4707.5,4062.5
S_D0: CON21.9 RS13.2 | length 123.3
  Top w8: RS13.2@4367.5,3962.5 4370.45,3959.55 CON21.9@4489.57,3959.55
S_D1: CON21.10 RS15.2 | length 119.2
  Top w8: CON21.10@4589.57,3959.55 4704.55,3959.55 RS15.2@4707.5,3962.5
S_D2: CON21.11 RS2.2 | length 123.3
  Top w8: RS2.2@4367.5,3862.5 4370.45,3859.55 CON21.11@4489.57,3859.55
S_D3: CON21.12 RS4.2 | length 119.2
  Top w8: CON21.12@4589.57,3859.55 4704.55,3859.55 RS4.2@4707.5,3862.5
S_D4: CON21.13 RS6.2 | length 123.3
  Top w8: RS6.2@4367.5,3762.5 4370.45,3759.55 CON21.13@4489.57,3759.55
S_D5: CON21.14 RS8.2 | length 119.2
  Top w8: CON21.14@4589.57,3759.55 4704.55,3759.55 RS8.2@4707.5,3762.5
S_D6: CON21.15 RS10.2 | length 123.3
  Top w8: RS10.2@4367.5,3662.5 4370.45,3659.55 CON21.15@4489.57,3659.55
S_D7: CON21.16 RS12.2 | length 119.2
  Top w8: CON21.16@4589.57,3659.55 4704.55,3659.55 RS12.2@4707.5,3662.5
S_HSYNC: CON21.18 RS7.2 | length 119.2
  Top w8: CON21.18@4589.57,3559.55 4704.55,3559.55 RS7.2@4707.5,3562.5
S_NRST: CON21.20 RS11.2 | length 119.2
  Top w8: CON21.20@4589.57,3459.55 4704.55,3459.55 RS11.2@4707.5,3462.5
S_PCLK: CON21.7 RS5.2 | length 123.3
  Top w10: RS5.2@4367.5,4062.5 4370.45,4059.55 CON21.7@4489.57,4059.55
S_PWDN: CON21.19 RS1.2 | length 123.3
  Top w8: RS1.2@4367.5,3462.5 4370.45,3459.55 CON21.19@4489.57,3459.55
S_VSYNC: CON21.17 RS9.2 | length 123.3
  Top w8: RS9.2@4367.5,3562.5 4370.45,3559.55 CON21.17@4489.57,3559.55
SC0CD: R108.1 SW24.10 | length 107.5
  Bottom w30: SW24.10@1300,1300 R108.1@1407.5,1300
SC0CLK: CON32.3 R104.2 SW24.7 | length 1869.9
  Top w10: CON32.3@495,586.59 v1(495,662.5)
  Bottom w10: v1(495,662.5) R104.2@495,725 494.5,725.5 472,725.5 448,749.5 448,1552 496,1600 SW24.7@1300,1600
SC0DAT: CON32.7 R106.2 SW24.8 | length 1069.1
  Top w8: CON32.7@495,1579.5 498,1582.5 R106.2@498,1693.5 498,1736 512,1750 858,1750 1108,1500 SW24.8@1300,1500
SC0PWR: R107.1 SW24.9 | length 951.3
  Bottom w8: R107.1@850,880 850,1368 882,1400 SW24.9@1300,1400
SC0RST: CON32.2 R105.2 SW24.6 | length 2039.2
  Top w8: v1(495.5,861) 595,761.5 CON32.2@595,586.59
  Bottom w8: R105.2@495,812.5 495.5,813 v1(495.5,861) 495.5,1512 535.5,1552 1320,1552 1352,1584 1352,1648 SW24.6@1300,1700
SCK: R80.1 RX4.2 U11.16 | length 441.7
  Top w8: R80.1@1162.5,5855 1192,5855 1200,5847 1200,5808 1213,5795 RX4.2@1237.5,5795 1237.5,5765.5 1232,5760 1136,5760 1128,5752 1128,5656 1155,5629 1181.1,5629 U11.16@1181.1,5614.86
SDA: R81.1 RX3.2 U11.17 | length 446.6
  Top w8: RX3.2@1012.5,5795 RX3.2@1012.5,5792 ; R81.1@1087.5,5855 1056,5855 1049,5848 1049,5800 1041,5792 RX3.2@1012.5,5792 ; U11.17@1147.64,5581.4 1147.24,5581 1067,5581 1056,5592 1056,5728 1012.5,5771.5 RX3.2@1012.5,5792
SDCD: CON22.10 R46.1 SW14.10 | length 1895.6
  Top w8: CON22.10@5850.89,6950.89 v1(5928,6950.89) 5944,6934.89 5944,5944 5984,5904 6504,5904 SW14.10@6600,6000
  Bottom w8: R46.1@5843.75,6942.5 5843.75,6950.89 v1(5928,6950.89)
SDCLK: R52.2 SW14.15 | length 375.5
  Top w10: SW14.15@6100,6000 6225,6125 6225,6280 6240,6295 R52.2@6262.5,6295
SDCMD: CON22.2 R45.1 SW14.16 | length 1927.3
  Top w8: v1(6559.74,6560) CON22.2@6559.74,6496.16 6559.74,6357.76 R45.1@6562.5,6355
  Bottom w8: SW14.16@6000,6000 6080,5920 6752,5920 6800,5968 6800,6576 6784,6592 6591.74,6592 v1(6559.74,6560)
SDD0: CON22.7 RN7.2 SW14.14 | length 1141.9
  Top w8: CON22.7@6067.62,6496.16 v1(6067.62,6568) ; SW14.14@6200,6000 6279,6079 RN7.2@6279,6118
  Bottom w8: v1(6067.62,6568) 6067.62,6596.38 6056,6608 5992,6608 5976,6592 5976,6112 5992,6096 6168,6096 6200,6064 SW14.14@6200,6000
SDD1: CON22.8 RN7.4 SW14.13 | length 1033.2
  Top w8: CON22.8@6002.66,6496.16 v1(6002.66,6568) ; SW14.13@6300,6000 6311,6011 RN7.4@6311,6118
  Bottom w8: v1(6002.66,6568) 6002.66,6125.34 6016,6112 6268,6112 6300,6080 SW14.13@6300,6000
SDD2: CON22.9 RN7.6 SW14.12 | length 1228.5
  Top w8: RN7.6@6343,6118 6343,6056 6344,6056 SW14.12@6400,6000 ; CON22.9@6756.59,6496.16 v1(6756.59,6560)
  Bottom w8: SW14.12@6400,6000 6464,5936 6744,5936 6784,5976 6784,6532.59 v1(6756.59,6560)
SDD3: CON22.1 RN7.8 SW14.11 | length 1187.3
  Top w8: RN7.8@6375,6118 6375,6072 6383,6064 6436,6064 SW14.11@6500,6000 ; CON22.1@6658.17,6496.16 v1(6658.17,6560)
  Bottom w8: SW14.11@6500,6000 6548,5952 6736,5952 6768,5984 6768,6450.17 v1(6658.17,6560)
SDPWR: R44.1 SW14.9 | length 132.5
  Top w40: SW14.9@6700,6000 R44.1@6700,6132.5
SDVD33: CON22.4 CT65.2 CT66.2 Q3.D R42.2 R45.2 R51.1 RN7.1 RN7.3 RN7.5 RN7.7 | length 1719.8
  Top w20: RN7.1@6279,6200 6279,6232 ; RN7.3@6311,6200 6311,6248 ; RN7.5@6343,6200 6343,6248 ; RN7.7@6375,6200 6375,6248
  Top w40: v2(6040,6355) R51.1@6100,6355 ; 6279,6232 6295,6248 6311,6248 6343,6248 6375,6248 6544,6248 6562.5,6266.5 R45.2@6562.5,6295 ; CON22.4@6362.89,6496.16 6362.89,6432 6400,6394.89 CT66.2@6400,6355 v2(6464,6355) 6524,6295 R45.2@6562.5,6295 ; R42.2@6925,6355 CT65.2@6850,6355 6847.22,6357.78 Q3.D@6737.5,6357.78 6670.78,6357.78 6608,6295 R45.2@6562.5,6295
  Bottom w40: v2(6040,6355) v2(6464,6355)
SDWP: CON22.11 PAD2.\ R121.1 | length 254.4
  Top w30: R121.1@5675,7217.5 PAD2.\@5675,7297.34 ; PAD2.\@5675,7300 PAD2.\@5675,7297.34 ; CON22.11@5846.95,7297.34 PAD2.\@5675,7297.34
SIICCLK: CON21.21 R119.2 RS14.2 | length 198.3
  Top w10: R119.2@4367.5,3287.5 RS14.2@4367.5,3362.5 4370.45,3359.55 CON21.21@4489.57,3359.55
SIICSDA: CON21.22 R120.2 RS16.2 | length 194.2
  Top w8: CON21.22@4589.57,3359.55 4704.55,3359.55 RS16.2@4707.5,3362.5 R120.2@4707.5,3287.5
SPICLK: SW12.11 U6.6 U7.16 | length 1259.1
  Top w10: v1(7475,7072) U7.16@7475,7011.52 7475,6960 7467,6952 7440,6952 7424,6936 7424,6864 7438,6850 U6.6@7490.5,6850
  Bottom w10: v1(7475,7072) 7475,6989 7504,6960 7968,6960 8032,7024 8226,7024 SW12.11@8275,6975
SPICS: R39.1 SW12.12 U6.1 U7.7 | length 945.3
  Top w8: U7.7@7775,6637.5 7775,6585 7792,6568 7896,6568 7920,6592 v1(7920,6712) R39.1@7920,6750 U6.1@7809.5,6750
  Bottom w8: v1(7920,6712) 7920,6880 8015,6975 SW12.12@8175,6975
SPIDI/D1: SW12.9 U6.2 U7.8 | length 1199.5
  Top w8: U6.2@7809.5,6800 7752,6800 7736,6784 7736,6720 7752,6704 7817,6704 v1(7825,6696) U7.8@7825,6637.5
  Bottom w8: v1(7825,6696) 7849,6672 7928,6672 7952,6696 7952,6888 7992,6928 8428,6928 SW12.9@8475,6975
SPIDO/D0: SW12.10 U6.5 U7.15 | length 1186.1
  Top w8: U6.5@7490.5,6900 7513,6900 7525,6912 U7.15@7525,7011.52 v1(7525,7080)
  Bottom w8: v1(7525,7080) 7525,7011 7544,6992 7968,6992 8022,7046 8304,7046 SW12.10@8375,6975
SPIHLD/D3: R40.1 SW12.7 U6.7 U7.1 | length 1893.9
  Top w8: v1(7432,6530) R40.1@7475,6530 U7.1@7475,6637.5 v1(7475,6696) 7483,6704 7544,6704 7552,6712 7552,6784 7536,6800 U6.7@7490.5,6800
  Bottom w8: v1(7475,6696) 7515,6656 7936,6656 7968,6688 7968,6880 8000,6912 8612,6912 SW12.7@8675,6975
SPIWP/D2: R38.1 SW12.8 U6.3 U7.9 | length 1380.3
  Top w8: U6.3@7809.5,6850 R38.1@7920,6850 7920,7064 7889,7095 7840,7095 v1(7825,7080) U7.9@7825,7011.52
  Bottom w8: v1(7825,7080) 7825,7023 7840,7008 7960,7008 8016,7064 8486,7064 SW12.8@8575,6975
SPKVD: CT73.2 L8.1 U11.26 | length 187.2
  Top w8: v2(1143.75,5352) 1167.75,5376 1192.79,5376 1200.79,5384 U11.26@1200.79,5410.14
  Bottom w40: L8.1@1087.5,5317.5 CT73.2@1143.75,5317.5 v2(1143.75,5352)
SYSPWREN: C7.1 R17.2 U2.1 U5.36 | length 8508.2
  Top w8: 1150,6479.97 U2.1@1162.6,6479.97 ; U5.36@3952.46,2903.15 4000.85,2903.15 v2(4048,2856)
  Top w40: C7.1@950,6342.5 R17.2@1100,6342.5 1096,6346.5 v2(1096,6433.97) 1096,6464 1111.97,6479.97 1150,6479.97 ; v2(2792,5200) v2(2832,5200) 3080,5200 3360,4920 v2(3360,4152) v2(3360,4112)
  Bottom w40: v2(1096,6433.97) 1096,6401.5 1121.5,6376 1576,6376 1680,6272 1680,6056 1720,6016 2420,6016 2500,5936 2500,5248 2548,5200 v2(2792,5200) v2(2832,5200) ; v2(3360,4152) v2(3360,4112) 3360,4096 3304,4040 2952,4040 2840,3928 2840,2464 2928,2376 3920,2376 3992,2448 3992,2800 v2(4048,2856)
SYSWKUP: C12.1 R20.1 SW5.1 U5.37 | length 7629.6
  Top w8: SW5.1@2065.16,7519.69 2065.16,7520 v1(2144,7520) ; v1(2600,6664) 2600,5416 2720,5296 2720,4304 v2(2760,4264) ; U5.37@3952.46,2918.9 4041.1,2918.9 4088,2872 v1(4088,2848)
  Bottom w8: R20.1@2264,7518 C12.1@2192,7518 2262.5,7520 v1(2144,7520) 2144,7376 2600,6920 v1(2600,6664) ; v2(2760,4264) 2800,4224 2800,2432 2896,2336 3936,2336 4032,2432 4032,2792 v1(4088,2848)
TCK: CON2.9 RN3.8 SW8.7 | length 1023.4
  Top w8: CON2.9@3500,7462.5 3448,7410.5 3448,7272 3504,7216 3672,7216 3800,7088 3800,7040 3776.5,7016.5 3696,7016.5 SW8.7@3650,7062.5
  Bottom w8: RN3.8@3550,6969.5 3550,7000 3566,7016 3603.5,7016 SW8.7@3650,7062.5
TDI: CON2.5 RN3.4 SW8.9 | length 1075.3
  Top w8: SW8.9@3450,7062.5 3528.5,6984 3792,6984 3832,7024 3832,7104 3648,7288 3648,7410.5 CON2.5@3700,7462.5
  Bottom w8: SW8.9@3450,7062.5 3486,7026.5 RN3.4@3486,6969.5
TDO: CON2.13 SW8.6 | length 706.2
  Top w8: CON2.13@3300,7462.5 3352,7410.5 3352,7256 3408,7200 3612.5,7200 SW8.6@3750,7062.5
TMS: CON2.7 RN3.6 SW8.8 | length 1018
  Top w8: SW8.8@3550,7062.5 3612.5,7000 3784,7000 3816,7032 3816,7096 3680,7232 3600,7232 3552,7280 3552,7414.5 CON2.7@3600,7462.5
  Bottom w8: RN3.6@3518,6969.5 3518,7030.5 SW8.8@3550,7062.5
TX+: CON24.1 U10.16 | length 757.1
  Top w4: CON24.1@312.5,4134.45 492.59,4134.45 534.65,4176.5 782.38,4176.5 846.27,4112.61 922.32,4112.61 928,4106.93 928,4072 937.5,4062.5 U10.16@984.5,4062.5
TX-: CON24.2 U10.14 | length 692.4
  Top w4: CON24.2@382.58,4174.61 382.58,4163.87 400,4146.45 487.62,4146.45 529.68,4188.5 787.35,4188.5 801.96,4173.89 802.39,4173.89 851.67,4124.61 922.7,4124.61 928,4129.91 928,4152 938.5,4162.5 U10.14@984.5,4162.5
UCTRL0: R110.1 R112.1 SW29.8 U17.4 | length 797.1
  Top w8: R112.1@1095,1912.5 1088,1912.5 1088,2056.27 1096,2064.27 ; U17.4@1150,2064.27 1096,2064.27 ; SW29.8@1300,2374.5 1352,2322.5 1352,2168 1320,2136 1087.5,2136 R110.1@1087.5,2132.5 1087.5,2072.77 1096,2064.27
UCTRL1: R109.1 R114.1 SW29.5 U18.4 | length 642.4
  Top w8: R114.1@1082.5,2275 1088,2280.5 1088,2418.77 1096,2426.77 ; U18.4@1137.5,2426.77 1096,2426.77 ; SW29.5@1300,2674.5 1162.5,2674.5 1136,2648 1136,2503 1128,2495 R109.1@1087.5,2495 1087.5,2435.27 1096,2426.77
UDH0: R134.2 U5.118 | length 3203.8
  Top w5: R134.2@730,3562.5 730,3544 741.5,3532.5 1060.97,3532.5 1116,3477.47 1116,2964.97 1155.46,2925.51 2093.02,2925.51 2179.03,3011.51 3304,3011.51 3305.87,3013.39 U5.118@3322.54,3013.39
UDH1: R135.2 U5.119 | length 3205.6
  Top w5: R135.2@730,3490.5 730,3512 738.5,3520.5 1056,3520.5 1104,3472.5 1104,2960 1150.49,2913.51 2097.99,2913.51 2184,2999.51 3304,2999.51 3305.87,2997.64 U5.119@3322.54,2997.64
UDO0: R127.2 R132.2 U5.124 | length 3818.2
  Top w5: R132.2@730,2337.5 730,2312.5 737.02,2305.48 751.15,2305.48 760.92,2315.25 760.92,2450.95 492.15,2719.73 492.15,2940.15 R127.2@517.5,2965.5 542.58,2940.42 974.56,2940.42 1114.8,2800.17 2074.89,2800.17 2193.75,2919.03 2659.31,2919.03 2732.34,2846 3205.51,2846 3278.41,2918.9 U5.124@3322.54,2918.9
UDO1: R128.2 R133.2 U5.125 | length 3767.5
  Top w5: R133.2@730,2262.5 730.18,2262.89 730.18,2286.68 736.98,2293.48 756.12,2293.48 772.92,2310.28 772.92,2455.92 504.15,2724.7 504.15,2888.15 R128.2@517.5,2901.5 544,2928 544,2928.42 969.58,2928.42 1109.83,2788.17 2079.86,2788.17 2198.72,2907.03 2654.34,2907.03 2727.37,2834 3210.49,2834 3279.63,2903.15 U5.125@3322.54,2903.15
UDO2: J4.2 U5.1 | length 2862.6
  Top w8: J4.2@725,2737.5 2145.5,2737.5 2264,2856 2424,2856 2600,2680 3337.41,2680 3393.41,2736 U5.1@3393.41,2785.04
UHVD33: CB3.1 CT40.1 R33.1 U5.120 | length 326.4
  Top w8: v2(3181,2952) 3207.61,2952 3237.5,2981.89 U5.120@3322.54,2981.89
  Top w40: CB3.1@3142.5,2962.5 3170.5,2962.5 v2(3181,2952)
  Bottom w40: R33.1@3056.25,2963.75 CT40.1@3125,2963.75 3169.25,2963.75 v2(3181,2952)
UOVD33: CB4.1 CT41.1 R34.1 U5.126 | length 338.2
  Top w8: v2(3192,2800) 3200.6,2800 3288,2887.4 U5.126@3322.54,2887.4
  Top w40: CB4.1@3142.5,2800 v2(3192,2800)
  Bottom w40: R34.1@3070,2800 CT41.1@3140,2800 v2(3192,2800)
UPL0VD12: CB6.1 CT43.1 R36.1 U5.122 | length 273.8
  Top w8: U5.122@3322.54,2950.39 3385.61,2950.39 v2(3400,2936)
  Bottom w40: R36.1@3243.75,2892.5 CT43.1@3306.25,2892.5 CB6.1@3368.75,2892.5 3384,2892.5 3400,2908.5 v2(3400,2936)
UPL1VD12: CB5.1 CT44.1 R37.1 U5.117 | length 275.6
  Top w8: U5.117@3322.54,3029.13 3362.37,3029.13 v2(3391.5,3000)
  Bottom w40: CT44.1@3200,3007.5 CB5.1@3262.5,3007.5 R37.1@3325,3007.5 3332.5,3000 v2(3391.5,3000)
UR0RX: CON33.3 U13.13 | length 267
  Top w8: U13.13@4575,625 4575,529 4592,512 4642,512 4666,488 CON33.3@4666,425
UR0RXO: SW25.4 U13.12 | length 357.7
  Top w8: SW25.4@4237.5,625 4292.5,680 4512,680 4525,667 U13.12@4525,625
UR0TX: CON33.2 U13.14 | length 326.2
  Top w8: U13.14@4625,625 4625,543 4640,528 4750,528 4774,504 CON33.2@4774,425
UR0TXI: SW25.3 U13.11 | length 423
  Top w8: SW25.3@4137.5,625 4202.5,560 4464,560 4475,571 U13.11@4475,625
UR6CTS: CON36.7 U15.8 | length 1127.7
  Top w8: U15.8@6150,825 v1(6150,896)
  Bottom w8: v1(6150,896) 6150,574 6032,456 6032,288 6080,240 6311.5,240 CON36.7@6382.5,311
UR6CTSO: SW27.8 U15.9 | length 220.8
  Top w8: SW27.8@5975,625 6014,664 6134,664 6150,648 U15.9@6150,625
UR6RTS: CON36.8 U15.7 | length 999.8
  Top w8: U15.7@6200,825 v1(6200,896)
  Bottom w8: v1(6200,896) 6200,600 6048,448 6048,296 6088,256 6219.5,256 CON36.8@6274.5,311
UR6RTSI: SW27.7 U15.10 | length 393.4
  Top w8: SW27.7@5875,625 5930,680 6184,680 6200,664 U15.10@6200,625
UR6RX: CON36.3 U15.13 | length 318.9
  Top w8: U15.13@6350,625 v1(6350,680)
  Bottom w8: CON36.3@6328.5,425 6350,446.5 v1(6350,680)
UR6RXO: SW27.6 U15.12 | length 609.9
  Top w8: SW27.6@5775,625 5840,560 6288,560 6300,572 U15.12@6300,625
UR6TX: CON36.2 U15.14 | length 325.1
  Top w8: U15.14@6400,625 v1(6400,680)
  Bottom w8: v1(6400,680) 6400,461.5 CON36.2@6436.5,425
UR6TXI: SW27.5 U15.11 | length 661.4
  Top w8: SW27.5@5675,625 5746,696 6226,696 6250,672 U15.11@6250,625
UR8CTS: CON34.7 U14.8 | length 1128.6
  Top w8: U14.8@2850,825 v1(2850,904)
  Bottom w8: v1(2850,904) 2850,578 2736,464 2736,304 2800,240 3011.5,240 CON34.7@3082.5,311
UR8CTSO: SW26.8 U14.9 | length 208.3
  Top w8: SW26.8@2687.5,625 2726.5,664 2834,664 2850,648 U14.9@2850,625
UR8RTS: CON34.8 U14.7 | length 1000.8
  Top w8: U14.7@2900,825 v1(2900,904)
  Bottom w8: v1(2900,904) 2900,604 2752,456 2752,312 2808,256 2919.5,256 CON34.8@2974.5,311
UR8RTSI: SW26.7 U14.10 | length 380.9
  Top w8: SW26.7@2587.5,625 2642.5,680 2884,680 2900,664 U14.10@2900,625
UR8RX: CON34.3 U14.13 | length 208.9
  Top w8: CON34.3@3028.5,425 3050,446.5 U14.13@3050,625
UR8RXO: SW26.6 U14.12 | length 599
  Top w8: SW26.6@2487.5,625 2552,560.5 2992,560.5 2999.5,568 2999.5,624.5 U14.12@3000,625
UR8TX: CON34.2 U14.14 | length 215.1
  Top w8: U14.14@3100,625 3100,461.5 CON34.2@3136.5,425
UR8TXI: SW26.5 U14.11 | length 644.2
  Top w8: SW26.5@2387.5,625 2458.5,696 2918,696 2950,664 U14.11@2950,625
UR10CTS: CON37.7 U16.8 | length 1106.4
  Top w8: U16.8@7662.5,825 v1(7662.5,896)
  Bottom w8: v1(7662.5,896) 7662.5,305.5 7720,248 7994.5,248 CON37.7@8057.5,311
UR10CTSO: SW28.8 U16.9 | length 229.5
  Top w8: SW28.8@7475,625 7514,664 7640,664 7662.5,641.5 U16.9@7662.5,625
UR10RTS: CON37.8 U16.7 | length 936.3
  Top w8: U16.7@7712.5,825 v1(7712.5,896)
  Bottom w8: v1(7712.5,896) 7712.5,303.5 7752,264 7902.5,264 CON37.8@7949.5,311
UR10RTSI: SW28.7 U16.10 | length 410.3
  Top w8: SW28.7@7375,625 7430,680 7704,680 7712.5,671.5 U16.10@7712.5,625
UR10RX: CON37.3 U16.13 | length 321.4
  Top w8: U16.13@7862.5,625 7862.5,553.5 7880,536 7987.5,536 8003.5,520 CON37.3@8003.5,425
UR10RXO: SW28.6 U16.12 | length 630.6
  Top w8: SW28.6@7275,625 7346,696 7800,696 7812.5,683.5 U16.12@7812.5,625
UR10TX: CON37.2 U16.14 | length 371.2
  Top w8: U16.14@7912.5,625 7912.5,567.5 7928,552 8079.5,552 8111.5,520 CON37.2@8111.5,425
UR10TXI: SW28.5 U16.11 | length 684.6
  Top w8: SW28.5@7175,625 7248,552 7752,552 7762.5,562.5 U16.11@7762.5,625
USBOC0: LED7.2 Q6.B R116.1 SW30.2 | length 748.7
  Top w8: R116.1@1892.5,2200 1892.5,2199.9 v1(1936,2199.9) Q6.B@1979.72,2199.9 1979.82,2200 2018,2200 2048,2230 LED7.2@2150,2230
  Bottom w8: SW30.2@1600,1987 1664,2051 1664,2144 1688,2168 1904.1,2168 v1(1936,2199.9)
USBOC1: LED8.2 Q7.B R118.1 SW30.3 | length 819.1
  Top w8: R118.1@1892.5,2362.5 1892.6,2362.4 v1(1936,2362.4) Q7.B@1979.72,2362.4 2017.9,2362.4 2048,2392.5 LED8.2@2150,2392.5
  Bottom w8: SW30.3@1600,2087 1648,2135 1648,2304 1672,2328 1901.6,2328 v1(1936,2362.4)
UV0: CON40.1 CT85.2 CT87.2 U17.6 U17.7 U17.8 | length 1677.5
  Top w15: 892.5,1987.5 U17.8@967.76,1987.5 ; 892.5,2012.53 893.06,2013.09 U17.7@967.76,2013.09 ; CT85.2@892.5,2038.68 U17.6@967.76,2038.68
  Top w40: v2(856,1912) 892.5,1948.5 892.5,1987.5 892.5,2012.53 CT85.2@892.5,2037.5 892.5,2038.68 CT87.2@892.5,2112.5
  Bottom w40: CON40.1@525,2429.92 368,2429.92 280,2341.92 280,2000 368,1912 v2(856,1912)
UV1: CON39.1 CT86.2 CT88.2 U18.6 U18.7 U18.8 | length 1750.4
  Top w15: 900,2375.59 915,2375.59 ; U18.8@955.26,2350 927.5,2350 915,2362.5 915,2375.59 ; U18.7@955.26,2375.59 915,2375.59 ; U18.6@955.26,2401.18 923.68,2401.18 915,2392.5 915,2375.59
  Top w30: CT86.2@880,2375.59 900,2375.59
  Top w40: CT86.2@880,2375 880,2375.59 CT88.2@880,2450 v2(880,2505)
  Bottom w40: CON39.1@525,3654.92 597.58,3654.92 625,3627.5 625,2612.5 687.5,2550 835,2550 v2(880,2505)
VBUS: CON38.1 D3.1 R111.2 | length 255.9
  Top w20: CON38.1@312.2,2977.8 393.8,2977.8 408,2992 408,3024 421.5,3037.5 R111.2@457.5,3037.5 456,3039 D3.1@456,3104
VD12: CB16.1 CB17.1 CB18.1 CB19.1 CB20.1 CB21.1 CT3.1 CT11.1 CT30.1 CT31.1 CT32.1 CT33.1 CT34.1 CT35.1 R10.2 R36.2 R37.2 SW3.2 U5.10 U5.13 U5.41 U5.82 U5.94 U5.115 U5.116 | length 2618.9
  Top w8: U5.116@3322.54,3044.88 3368.25,3044.88 v2(3376,3052.63) 3368,3060.63 U5.115@3322.54,3060.63 ; U5.94@3424.9,3414.96 3424.9,3375.1 3437.5,3362.5 v2(3450,3362.5) ; v2(3520,2896) 3535.14,2880.86 U5.10@3535.14,2785.04 ; v2(3560,3312) 3600,3312 3624,3336 3624,3368 3613.88,3378.12 U5.82@3613.88,3414.96 ; U5.13@3582.38,2785.04 3582.38,2878.38 v2(3600,2896) ; v2(3868,2987.5) 3873.61,2981.89 U5.41@3952.46,2981.89
  Top w30: SW3.2@1662.5,6130 1704,6130 1714,6120 CT11.1@1750,6120
  Top w40: CT3.1@1570,6450 R10.2@1570,6375 1570,6358 1600,6328 1784,6328 1824,6288 1824,6152 1792,6120 CT11.1@1750,6120 v2(1750,6072) v2(1800,6072)
  Bottom w40: R36.2@3243.75,2832.5 3243.75,2775 v2(3268.75,2750) ; R37.2@3325,3067.5 3325,3152 3349,3176 v2(3392,3176) ; v2(3376,3052.63) 3392.12,3068.75 CB21.1@3426.25,3068.75 CT35.1@3426.25,3131.25 v2(3384,3131.25) ; CB20.1@3431.25,3311.25 CB20.1@3450,3311.25 ; v2(3450,3362.5) CB20.1@3450,3311.25 ; v2(3455,2896) CT30.1@3455,2935 CB16.1@3520,2935 v2(3520,2896) ; v2(3500,3352) CT34.1@3500,3311.25 CB20.1@3450,3311.25 ; v2(3560,3312) 3560.75,3311.25 CB19.1@3625,3311.25 CT33.1@3693.75,3311.25 v2(3752,3311.25) ; v2(3600,2896) CB17.1@3600,2935 CT31.1@3665,2935 v2(3665,2896) ; CT32.1@3830,3062.5 CB18.1@3830,2987.5 v2(3868,2987.5)
VD18: CM1.1 CM4.1 CT4.1 CT15.1 CT37.1 CT38.1 R11.2 SW4.2 U5.11 U5.12 U5.83 U5.84 | length 7997.9
  Top w8: U5.11@3550.89,2785.04 3550.89,2744 v2(3560,2736) 3560,2737.11 3566.89,2744 3566.89,2784.79 U5.12@3566.63,2785.04 ; U5.84@3582.38,3414.96 3582.38,3361.62 v2(3592,3360) 3598.13,3358.13 U5.83@3598.13,3414.96
  Top w40: SW4.2@2300,6492.5 2385,6492.5 CT15.1@2387.5,6495 ; v2(2387.5,6400) v2(2387.5,6440) CT15.1@2387.5,6495 ; CT4.1@2525,6657.5 R11.2@2450,6657.5 2450,6512 2433,6495 CT15.1@2387.5,6495 ; v2(2880,5256) v2(2920,5256) 3104,5256 3416,4944 v2(3416,4288) v2(3416,4248)
  Bottom w40: v2(2387.5,6440) v2(2387.5,6400) 2387.5,6135 2562.5,5960 2562.5,5312 2618.5,5256 v2(2880,5256) v2(2920,5256) ; v2(3416,4288) v2(3416,4248) 3416,3800 ; v2(3560,2736) CM1.1@3560,2785 CT37.1@3490,2785 3362.5,2785 3337.5,2760 3337.5,2472 3297.5,2432 2960,2432 2896,2496 2896,3648 3024,3776 3392,3776 ; v2(3592,3360) 3592,3413 CM4.1@3590,3415 3648.75,3415 CT38.1@3650,3413.75 3792,3413.75 3810.25,3432 3810.25,3749.75 3784,3776 3448,3776 ; 3392,3776 3416,3800 ; 3392,3776 3448,3776 ; 3416,3800 3424,3800 3448,3776